# Altium PCB PCB2.PcbDoc
Units mm, origin at the board's own origin, x right, y up, seen from the top; angles counter-clockwise.
Board outline 80 x 90 mm, 2 copper layers (Top Layer, Bottom Layer); 17 components, 19 nets, 89 pads, 0 vias.
Unrouted connection lines stored in the file: 1.
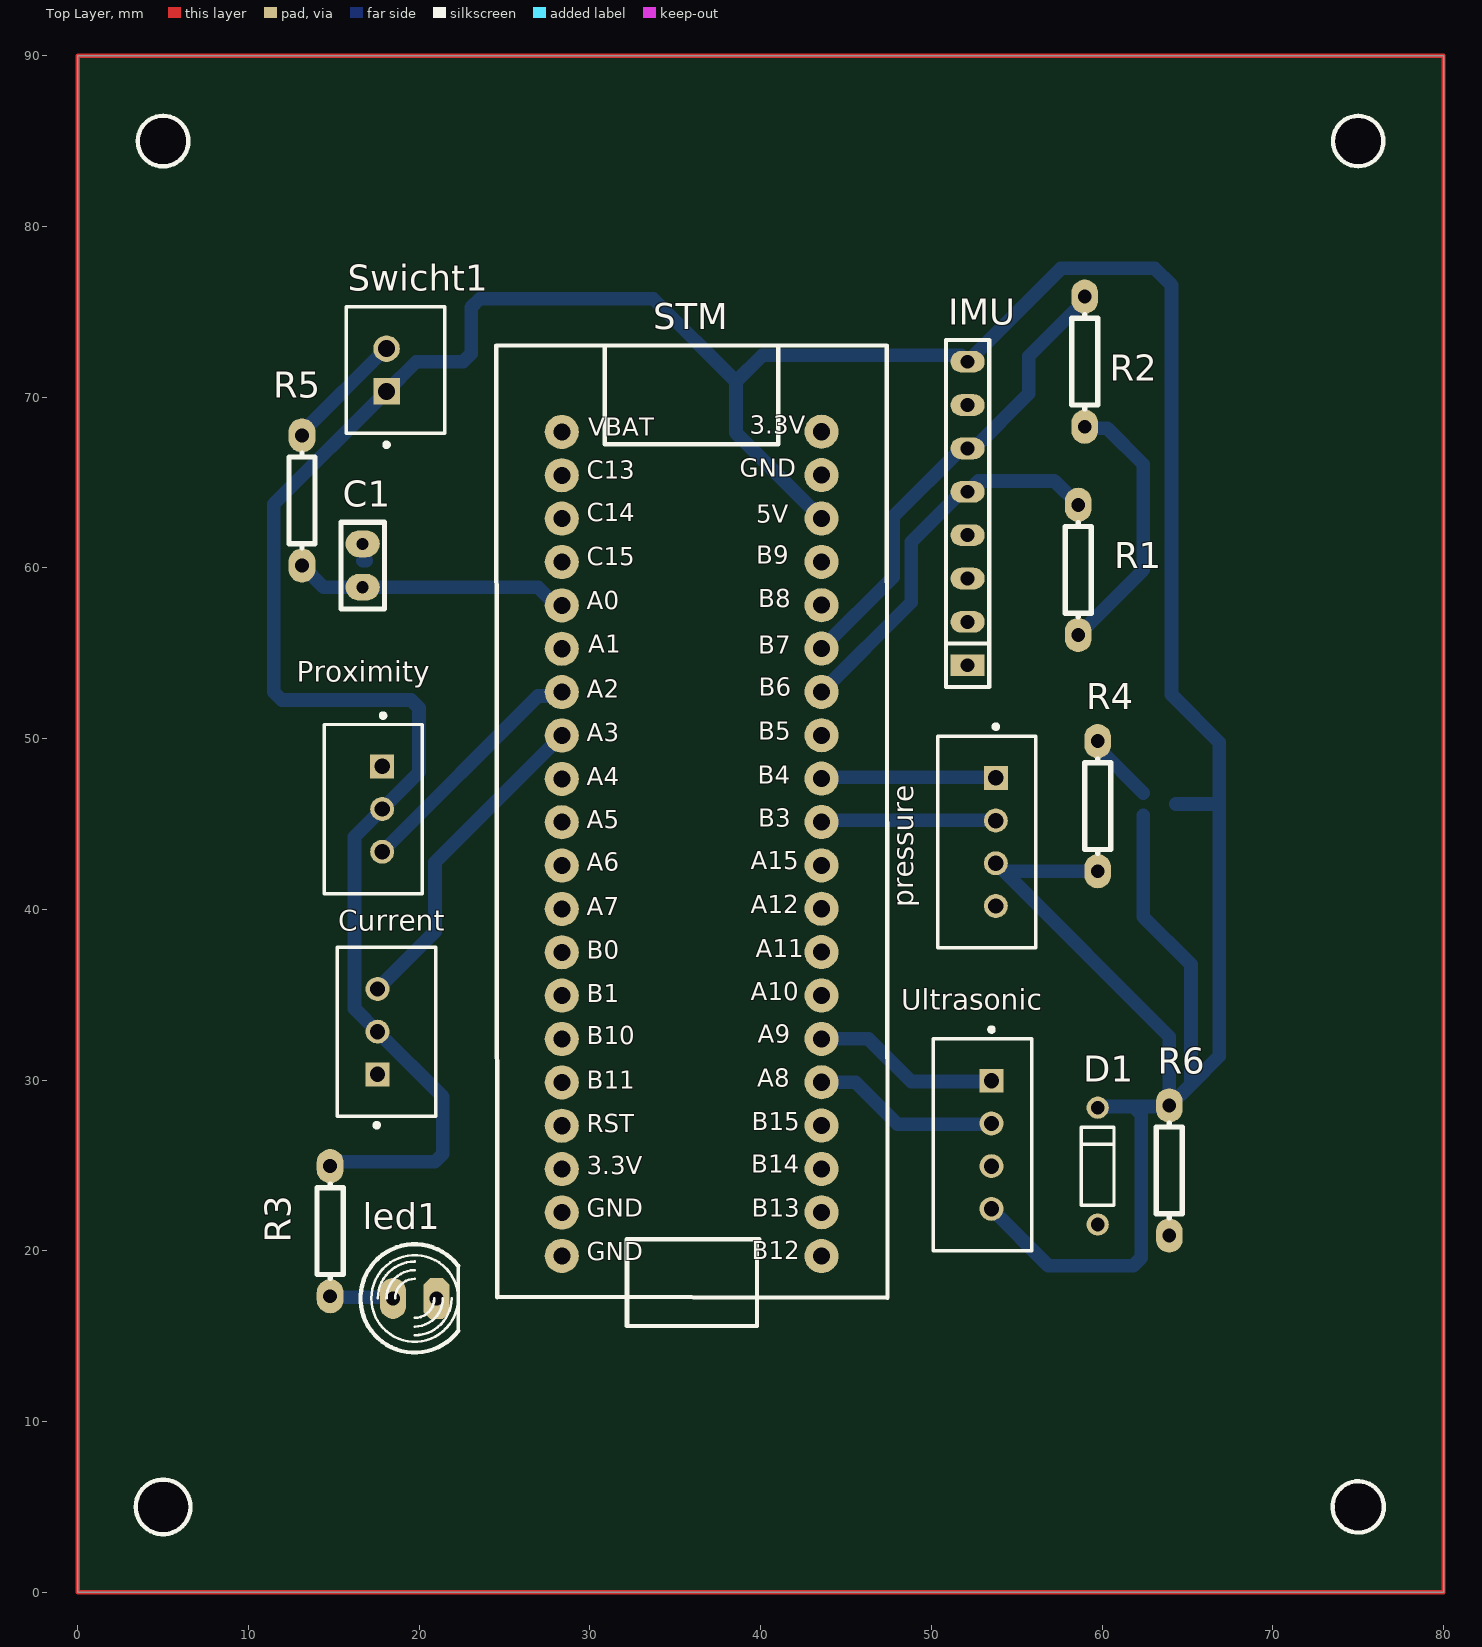
[diagram p0: Top Layer view]
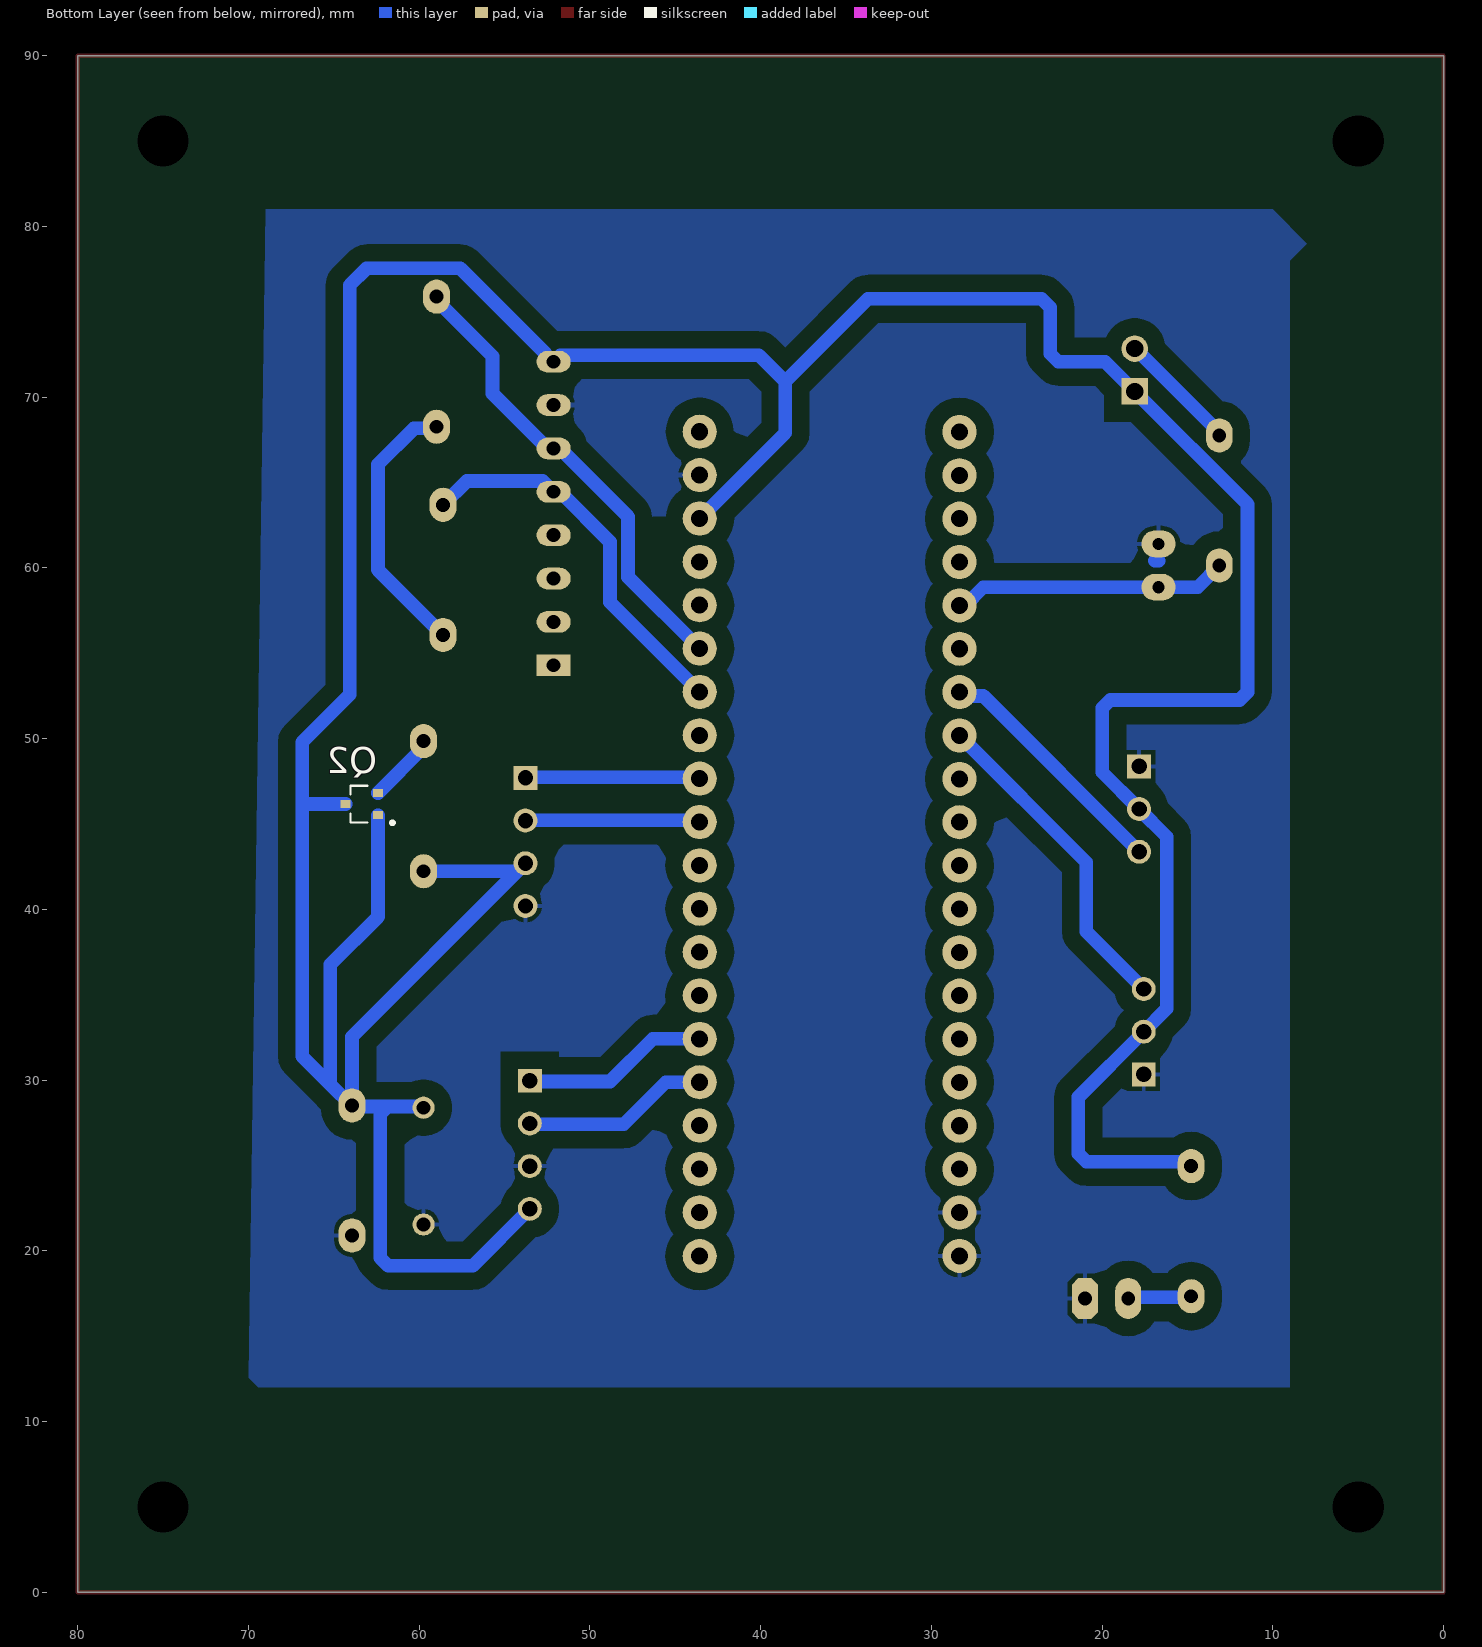
[diagram p1: Bottom Layer view, seen from below]

## Layer stack, top to bottom
Top Solder: solder mask 0.0102, Solder Resist, Dk 3.5
Top Layer: signal copper 0.0356
Dielectric 1: dielectric 0.32, FR-4, Dk 4.8
Bottom Layer: signal copper 0.0356
Bottom Solder: solder mask 0.0102, Solder Resist, Dk 3.5

## Board outline
0,0 0,90 80,90 80,0

## Design rules (kind name [scope] priority, off if disabled: settings)
Clearance Clearance_1 [InNamedPolygon('GND_L02_P000')] p1: gap=1 ignorepadtopadclearanceinfootprint=FALSE
Clearance [All] p2: gap=0.8 ignorepadtopadclearanceinfootprint=FALSE
PolygonConnect [All] p1: connectstyle=Relief reliefconductorwidth=0.254 reliefentries=4 polygonreliefangle="90 Angle" airgapwidth=0.254
RoutingLayers [All] p1: top layer_v5=FALSE bottom layer_v5=TRUE
RoutingVias [All] p1: holewidth=0.711 width=1.27 viastyle="Through Hole" minholewidth=0.711 minwidth=1.27 maxholewidth=0.711 maxwidth=1.27
SolderMaskExpansion [All] p1: expansion=0.102 istentingtop=FALSE
SupplyNets "Schematic Supply Nets_2" [InNet('+5')] p1: voltage=0.000
SupplyNets "Schematic Supply Nets_1" [InNet('+3.3')] p2: voltage=0.000
SupplyNets "Schematic Supply Nets" [InNet('GND')] p3: voltage=0.000
Width [All] p1: maxlimit=0.8 minlimit=0.8 preferedwidth=0.8 minimp=50.000000 maximp=50.000000 favimp=50.000000
29 further rules are at their usual default settings.

## Components (designator, comment, footprint, x,y, rotation, side; value= is the part's Value field where it differs from the comment)
C1 "100n" RAD0.1 16.691,58.87 r90 top
Current "B3B-XH-A(LF)(SN)" FP-B3B-XH-A_LF_SN-MFG 18.088,32.835 r90 top
D1 "BZX79C3V6" FAIR-DO-35-2 59.744,24.961 r90 top (schematic designator D?)
IMU "HEADER 8" SIP8 52.124,54.298 r90 top
led1 "Power" "LED-05 R" 19.739,17.214 r0 top
pressure "B4B-XH-A(LF)(SN)" FP-B4B-XH-A_LF_SN-MFG 53.25,43.951 r90 top (schematic designator Prusure)
Proximity "B3B-XH-A(LF)(SN)" FP-B3B-XH-A_LF_SN-MFG 17.309,45.876 r270 top
Q2 "DMP2160UW-7" TRANS_DMP2160UW-7 63.366,46.17 r0 bottom
R1 "RES1" AXIAL0.3 58.601,63.696 r270 top (schematic designator 1)
R2 "RES1" AXIAL0.3 58.982,75.888 r270 top (schematic designator 2)
R3 "300" AXIAL0.3 14.786,24.961 r270 top (schematic designator R1)
R4 "1700" AXIAL0.3 59.744,42.233 r90 top (schematic designator 4)
R5 "1K" AXIAL0.3 13.135,60.14 r90 top (schematic designator 5)
R6 "200" AXIAL0.3 63.935,20.897 r90 top (schematic designator 3)
STM "STM32F103C8T6" "Stm32 BluePill" 35.741,49.599 r0 top
Swicht1 "B2B-XH-A(LF)(SN)" FP-B2B-XH-A_LF_SN-MFG 18.613,71.59 r90 top
Ultrasonic "B4B-XH-A(LF)(SN)" FP-B4B-XH-A_LF_SN-MFG 52.996,26.211 r90 top

## Footprints (in the part's own frame and the unit in brackets; to place one, negate y for a bottom-side part, rotate by r counter-clockwise, add the part's x,y. Pads: shape width x height; smd on the part's side, far side on the other; paste and mask are expansions set on the pad)
AXIAL0.3 [mil]
  oval 78.74x62 hole 32: 1(0,0) 2(300,0)
  silkscreen extent 41,-30 259,30
FAIR-DO-35-2 [mm] "TH, 2-Leads, Dia 1.91mm"
  round 1.3 hole 0.8: 1(-3.42,0) 2(3.42,0)
  silkscreen extent -2.28,-0.95 2.28,0.95, body extent -3.7,-0.95 3.7,0.95, height 1.91
FP-B2B-XH-A_LF_SN-MFG [mm]
  rect 1.55x1.55 hole 1 paste-2539.97 mask+0: 1(-1.25,0.525)
  round 1.55 hole 1 paste-2539.97 mask+0: 2(1.25,0.525)
  silkscreen extent -4.5,-2.87 3.7,2.88, body extent -3.8,-2.98 3.8,2.98, height 0.25
FP-B3B-XH-A_LF_SN-MFG [mm]
  rect 1.4x1.4 hole 0.9 paste-2539.97 mask+0: 1(-2.5,0.525)
  round 1.4 hole 0.9 paste-2539.97 mask+0: 2(0,0.525) 3(2.5,0.525)
  silkscreen extent -5.6,-2.87 4.95,2.88, body extent -5.05,-2.98 5.05,2.98, height 0.25
FP-B4B-XH-A_LF_SN-MFG [mm]
  rect 1.4x1.4 hole 0.9 paste-2539.97 mask+0: 1(3.75,-0.525)
  round 1.4 hole 0.9 paste-2539.97 mask+0: 2(1.25,-0.525) 3(-1.25,-0.525) 4(-3.75,-0.525)
  silkscreen extent -6.2,-2.88 6.87,2.87, body extent -6.3,-2.98 6.3,2.98, height 0.25
"LED-05 R" [mm] "Light emitting diode dia 5mm red color"
  oval 1.524x2.4 hole 0.813: 1(-1.27,0)
  oct 1.524x2.4 hole 0.813: 2(1.27,0)
  silkscreen extent -3.17,-3.17 2.54,3.17, body extent -2.98,-3.01 2.44,3.01, height 12.31
RAD0.1 [mil]
  oval 62x78.74 hole 28: 1(0,0) 2(100,0)
  silkscreen extent -50,-50 150,50
SIP8 [mm]
  rect 1.27x2 hole 0.813: 1(0,0)
  oval 1.27x2 hole 0.813: 2(2.54,0) 3(5.08,0) 4(7.62,0) 5(10.16,0) 6(12.7,0) 7(15.24,0) 8(17.78,0)
  silkscreen extent -1.27,-1.27 19.05,1.27
"Stm32 BluePill" [mm]
  round 2 hole 1: 1(7.828,-29.909) 2(7.828,-27.343) 3(7.828,-24.803) 4(7.828,-22.263) 5(7.828,-19.723) 6(7.828,-17.183) 7(7.828,-14.643) 8(7.828,-12.103) 9(7.828,-9.563) 10(7.828,-7.023) 11(7.828,-4.483) 12(7.828,-1.943) 13(7.828,0.597) 14(7.828,3.137) 15(7.828,5.677) 16(7.828,8.217) 17(7.828,10.757) 18(7.828,13.297) 19(7.828,15.837) 20(7.828,18.377) 21(-7.386,18.366) 22(-7.386,15.826) 23(-7.386,13.286) 24(-7.386,10.746) 25(-7.386,8.206) 26(-7.386,5.666) 27(-7.386,3.126) 28(-7.386,0.586) 29(-7.386,-1.954) 30(-7.386,-4.494) 31(-7.386,-7.034) 32(-7.386,-9.574) 33(-7.386,-12.114) 34(-7.386,-14.654) 35(-7.386,-17.194) 36(-7.386,-19.734) 37(-7.386,-22.274) 38(-7.386,-24.814) 39(-7.386,-27.354) 40(-7.386,-29.894)
  silkscreen extent -11.22,-34 11.69,23.43, body extent -11.18,-33.27 11.68,24.29, height 12.31
TRANS_DMP2160UW-7 [mm]
  rect 0.6x0.47 smd: 1(-0.95,0.65) 2(-0.95,-0.65) 3(0.95,0)
  silkscreen extent -1.9,-1.07 0.65,1.2, body extent -1.05,-1.07 1.05,1.07, height 1.1

## Part data
C1: library part CAP, "Capacitor"
Current Proximity: library part CMP-17439-000014-3, "CONN HEADER VERT 3POS 2.5MM", Color=Natural, Contact Resistance=20mR, Current Rating=3A, Flammability Rating="UL94 V-0", Housing Color=White, Insulation Resistance=1GR, Max Operating Temperature=85°C, Max Voltage Rating (AC)=250V, Min Operating Temperature=-25°C, Connector Type=Header, Contact Finish - Mating=TIN, Contact Material=Brass, Contact Plating=Tin, Contact Shape=Square, Contact Type="Male Pin", Depth=5.75mm, Fastening Type=Detent, Gender=Male, Housing Material=Polyamide, Insulation Color=Natural, Insulation Material=Nylon, Lead Free="Lead Free", Lead Pitch=2.5mm, Length=9.9mm, Max Current Rating=3A, Max Voltage Rating (DC)=250V, Mount="Through Hole", Number of Contacts=3, Number of Positions=3, Number of Rows=1, Orientation=Straight, Packaging=Bulk, Pitch=2.5mm, REACH SVHC="No SVHC", Series=XH, Termination=Solder, Voltage Rating=250V, Voltage Rating (AC)=250V, Wire/Cable Gauge=22AWG
D1: library part CMP-004-00021-2, "Zener Diode, 3.6 V, 5 mA, -65 to 200 degC, 2-Pin DO-35, RoHS, Bulk", Case/Package=DO-35-2, Forward Voltage=1.5V, Manufacturer="Fairchild Semiconductor", Max Operating Temperature=200°C, Min Operating Temperature=-65°C, Package Description="2-Pin Through Hole Diode, Dia 1.72 mm, Body Length 3.805 mm", Package Quantity=1000, Power=500mW, Tolerance=6%, Datasheet URL=https://www.fairchildsemi.com/datasheets/BZ/BZX79C3V6.pdf, Datasheet Version="Rev. C1, 07/2007", Impedance=90Ohm, Manufacturer URL=https://www.fairchildsemi.com/, Mounting Technology=TH, Package Reference=DO-35-2, Package URL=https://www.fairchildsemi.com/package-drawings/DO/DO35A.pdf, Packaging=Bulk, Pins=2, RoHS Compliant=True
IMU: "8 Pin Header"
led1: library part LED_1
pressure Ultrasonic: library part CMP-17439-000250-1, "CONN HEADER VERT 4POS 2.5MM", Color=Natural, Contact Resistance=20mR, Current Rating=3A, Flammability Rating="UL94 V-0", Housing Color=White, Insulation Resistance=1GR, Max Operating Temperature=85°C, Max Voltage Rating (AC)=250V, Min Operating Temperature=-25°C, Package Quantity=500, Connector Type=Header, Contact Finish - Mating=TIN, Contact Material=Brass, Contact Plating=Tin, Contact Shape=Square, Contact Type="Male Pin", Depth=5.75mm, Fastening Type=Detent, Gender=Male, Housing Material=Polyamide, Insulation Color=Natural, Insulation Material=Nylon, Lead Free="Lead Free", Lead Pitch=2.5mm, Length=12.4mm, Mated Stacking Heights=9.8mm, Material=Polyamide, Max Current Rating=3A, Max Voltage Rating (DC)=250V, Mount="Through Hole", Number of Contacts=4, Number of Positions=4, Number of Rows=1, Orientation=Straight, Packaging=Bulk, Pitch=2.5mm, REACH SVHC="No SVHC", Series=XH, Termination=Solder, Voltage Rating=250V, Voltage Rating (AC)=250V, Wire/Cable Gauge=22AWG
Q2: "P-Channel 20 V 1.5A (Ta) 350mW (Ta) Surface Mount SOT-323", Package="SOT-323 Diodes Inc.", Availability="In Stock", Check_prices=https://www.snapeda.com/parts/DMP2160UW-7/Diodes+Inc./view-part/?ref=eda, MF="Diodes Inc.", MP=DMP2160UW-7, Price=None, Purchase-URL=https://pricing.snapeda.com/search/part/DMP2160UW-7/?ref=eda, SnapEDA_Link=https://www.snapeda.com/parts/DMP2160UW-7/Diodes+Inc./view-part/?ref=snap
R3 R4 R5 R6: library part RES1
STM: library part BluePill, "Designed By @Alixahedi"
Swicht1: library part CMP-2000-05888-3, "CONN HEADER VERT 2POS 2.5MM", Color=Natural, Contact Resistance=20mR, Current Rating=3A, Housing Color=White, Insulation Resistance=1GR, Max Operating Temperature=85°C, Max Voltage Rating (AC)=250V, Min Operating Temperature=-25°C, Connector Type="Male Pin", Contact Material=Brass, Contact Plating=Tin, Contact Type="Male Pin", Depth=5.75mm, Fastening Type=Detent, Housing Material=Polyamide, Lead Free="Lead Free", Lead Pitch=2.5mm, Length=7.4mm, Max Current Rating=3A, Max Voltage Rating (DC)=250V, Mount="Through Hole", Number of Contacts=2, Number of Positions=2, Number of Rows=1, Orientation=Straight, Packaging=Bulk, Pitch=2.5mm, REACH SVHC="No SVHC", Series=XH, Termination=Solder, Voltage Rating=250V, Voltage Rating (AC)=250V, Wire/Cable Gauge=22AWG

## Free pads (board coordinates)
  round 1.524 hole 3: 2(5,5) 2(5,85) 3(75,5) 3(75,85)

## Nets (pads, with @x,y where several pads share a name; then routed paths per layer and width w, separated by ;. In a path a pad name is that pad's centre, name@x,y a point inside that pad or via, vN(x,y) a via of type N, cw(c..) or ccw(c..) an arc to the next point about the centre after c; other vN are vias at no path point)
5V_VCC: Current.2 D1.2 IMU.8 pressure.3 Proximity.2 Q2.1 Q2.3 R3.1 R4.1 R6.2 STM.18 Swicht1.1 Ultrasonic.4 | length 248.8
  Bottom Layer w0.8: R3.1 15.04,25.215 20.921,25.215 21.39,25.683 21.39,29.008 Current.2 16.209,34.189 16.209,44.251 Proximity.2 19.993,48.035 19.993,51.797 19.524,52.266 11.952,52.266 11.484,52.734 11.484,63.736 Swicht1.1 19.826,72.078 22.572,72.078 23.041,72.546 23.041,75.253 23.549,75.761 33.709,75.761 38.557,70.913 ; STM.18 38.557,67.908 38.557,70.913 ; Ultrasonic.4 56.863,19.119 61.815,19.119 62.284,19.587 62.284,28.004 61.839,28.449 ; pressure.3 54.324,42.151 63.935,32.541 R6.2 63.867,28.449 61.839,28.449 ; 54.405,42.233 R4.1 ; D1.2 59.812,28.449 61.839,28.449 ; Q2.1 62.416,39.561 65.205,36.772 65.205,29.747 ; R6.2@63.92,28.463 65.205,29.747 ; Q2.3 66.856,46.17 ; 38.557,70.913 40.102,72.459 51.743,72.459 IMU.8 52.361,72.078 52.579,72.295 52.579,72.533 57.588,77.542 63.082,77.542 64.062,76.562 64.062,52.586 66.856,49.792 66.856,46.17 ; 65.205,29.747 66.856,31.398 66.856,46.17
+3.3: Q2.2 R4.2 | length 4.2
  Bottom Layer w0.8: R4.2@59.807,49.916 R4.2 59.744,49.492 Q2.2
+5: R1.2 R2.2 | length 15.9
  Bottom Layer w0.8: R1.2 62.411,59.886 62.411,66.068 60.308,68.171 59.078,68.171 R2.2
CUR_OUT: Current.3 STM.28 | length 19.3
  Bottom Layer w0.8: Current.3 20.928,38.7 20.928,42.759 STM.28
ECHO: STM.5 Ultrasonic.2 | length 11
  Bottom Layer w0.8: STM.5 45.558,29.876 48.02,27.414 Ultrasonic.2@53.521,27.414
GND: C1.2 Current.1 D1.1 IMU.7 led1.2 pressure.4 Proximity.1 R6.1 STM.19 STM.39 STM.40 Ultrasonic.3 | length 0.2
  Bottom Layer w0.8: 16.691,60.41 16.903,60.41
IMU_ADD: IMU.2
IMU_SCL: IMU.6 R2.1 STM.15 | length 27.5
  Bottom Layer w0.8: STM.15@43.569,55.391 STM.15 47.765,59.471 47.765,63.004 51.759,66.998 IMU.6 52.489,66.998 55.706,70.215 55.706,72.399 58.982,75.675 R2.1
IMU_SDA: IMU.5 R1.1 STM.14 | length 22.9
  Bottom Layer w0.8: STM.14@43.569,52.851 STM.14 48.819,57.985 48.819,61.518 51.759,64.458 IMU.5 52.759,65.093 57.204,65.093 R1.1
IMU_XDA: IMU.4
INT: IMU.1
N_C: C1.1 R5.1 STM.25 | length 16.2
  Bottom Layer w0.8: R5.1 13.135,60.137 14.402,58.87 C1.1 26.965,58.87 28.03,57.805 STM.25
Net5_2: R5.2 Swicht1.2 | length 7.2
  Bottom Layer w0.8: R5.2 13.135,67.929 18.045,72.84 Swicht1.2
NetR1_2: led1.1 R3.2 | length 4
  Bottom Layer w0.8: R3.2 14.849,17.277 18.405,17.277 led1.1 led1.1@18.469,16.972
PR_OUT: pressure.1 STM.12 | length 10.2
  Bottom Layer w0.8: STM.12 43.655,47.742 pressure.1@53.775,47.742
PR_SCK: pressure.2 STM.11 | length 10.2
  Bottom Layer w0.8: STM.11 43.675,45.222 pressure.2@53.775,45.222
PROX_OUT: Proximity.3 STM.27 | length 14.4
  Bottom Layer w0.8: Proximity.3 26.953,52.495 28.125,52.495 STM.27
TRIG: STM.6 Ultrasonic.1 | length 11
  Bottom Layer w0.8: STM.6 46.32,32.416 48.822,29.914 Ultrasonic.1@53.521,29.914
XCL: IMU.3
pads on no net: STM.1 STM.2 STM.3 STM.4 STM.7 STM.8 STM.9 STM.10 STM.13 STM.16 STM.17 STM.20 STM.21 STM.22 STM.23 STM.24 STM.26 STM.29 STM.30 STM.31 STM.32 STM.33 STM.34 STM.35 STM.36 STM.37 STM.38
copper on no net: | length 340
  Top Layer w0.254: 0,0 80,0 80,90 0,90 0,0

## Polygon pours and split planes (outlines as drawn)
GND on Bottom Layer "GND_L02_P000" (solid, remove dead copper, pour order 0): 69,81 10,81 8,79 9,78 9,12 70,12

## Silkscreen, mask and mechanical layers (free items; w line width, h text height)
Top Overlay:
  circle w0.254: c5,5 r1.602
  circle w0.254: c5,85 r1.483
  circle w0.254: c75,85 r1.475
  circle w0.254: c75,5 r1.503

## Text inside footprints (layer, text, board x,y; h text height)
STM: Top Overlay "B12" at 39.49,19.144 h1.78; Top Overlay "GND" at 29.828,19.087 h1.78; Top Overlay "B13" at 39.48,21.654 h1.78; Top Overlay "GND" at 29.828,21.652 h1.78; Top Overlay "A1" at 29.898,54.679 h1.78; Top Overlay "A0" at 29.827,57.238 h1.78; Top Overlay "C14" at 29.828,62.368 h1.78; Top Overlay "C13" at 29.828,64.859 h1.78; Top Overlay "C15" at 29.828,59.803 h1.78; Top Overlay "B6" at 39.891,52.158 h1.78; Top Overlay "B4" at 39.828,47.008 h1.78; Top Overlay "B7" at 39.861,54.628 h1.78; Top Overlay "B14" at 39.459,24.224 h1.78; Top Overlay "B5" at 39.861,49.592 h1.78; Top Overlay "VBAT" at 29.899,67.379 h1.78; Top Overlay "A10" at 39.425,34.327 h1.78; Top Overlay "A12" at 39.425,39.413 h1.78; Top Overlay "A15" at 39.425,41.998 h1.78; Top Overlay "A9" at 39.827,31.838 h1.78; Top Overlay "B3" at 39.861,44.488 h1.78; Top Overlay "A11" at 39.712,36.848 h1.78; Top Overlay "A8" at 39.796,29.272 h1.78; Top Overlay "B15" at 39.49,26.707 h1.78; Top Overlay "3.3V" at 29.828,24.143 h1.78; Top Overlay "B1" at 29.828,34.206 h1.78; Top Overlay "B0" at 29.828,36.765 h1.78; Top Overlay "A7" at 29.827,39.312 h1.78; Top Overlay "A6" at 29.827,41.896 h1.78; Top Overlay "B11" at 29.828,29.152 h1.78; Top Overlay "B10" at 29.828,31.736 h1.78; Top Overlay "RST" at 29.828,26.605 h1.78; Top Overlay "A4" at 29.827,46.906 h1.78; Top Overlay "A3" at 29.827,49.492 h1.78; Top Overlay "A2" at 29.827,52.037 h1.78; Top Overlay "A5" at 29.827,44.385 h1.78; Top Overlay "GND" at 38.789,64.985 h1.78; Top Overlay "3.3V" at 39.353,67.501 h1.78; Top Overlay "B8" at 39.861,57.339 h1.78; Top Overlay "B9" at 39.734,59.879 h1.78; Top Overlay "5V" at 39.734,62.292 h1.78